# EAGLE board a2402-4069-distortion (EAGLE 7.5.0)

Size 100 x 80 mm. Coordinates in mm from the lower left corner, seen from the top.
Outline: 0,0 100,0 100,80 0,80 0,0
Copper layers (1*16): Top 0.035mm / dielectric 1.5mm / Bottom 0.035mm
Design rules "default": minimum track width 10mil, minimum drill 24mil, track to track 8mil, track to pad 8mil, pad to pad 8mil, via to via 8mil, smd to smd 8mil, copper to edge 40mil, drill to drill 8mil, minimum pad ring 10mil, minimum via ring 8mil, stop-mask expansion 4mil, vias tented up to drill 0mil, thermal gap 10mil

## Footprints (pad centres in the part's own frame; a part is rotated, then mirrored left to right if it is on the bottom)
E2-5 = drill 0.813 square: + -1.016,0 | drill 0.813: - 1.016,0
C-0805 = smd 1.3 x 1.5: 1 -0.95,0; 2 0.95,0
C050-035X075 = drill 0.7: 1 -2.54,0; 2 2.54,0
SO-8 = smd 0.66 x 2.032: 1 -1.905,-3.073; 2 -0.635,-3.073; 3 0.635,-3.073; 4 1.905,-3.073; 5 1.905,3.073; 6 0.635,3.073; 7 -0.635,3.073; 8 -1.905,3.073
DIP-14 = drill 0.813 square: 1 -7.62,-3.81 | drill 0.813: 2 -5.08,-3.81; 3 -2.54,-3.81; 4 0,-3.81; 5 2.54,-3.81; 6 5.08,-3.81; 7 7.62,-3.81; 8 7.62,3.81; 9 5.08,3.81; 10 2.54,3.81; 11 0,3.81; 12 -2.54,3.81; 13 -5.08,3.81; 14 -7.62,3.81
1206 = smd 1.35 x 1.2: 1 -1.7,0; 2 1.65,0
ST2-BOARD-50 = drill 0.8: A+15 44.285,7.31; A+15' 44.285,37.69; A-15 45.555,9.215; A-15' 45.555,35.785; ACV1 51.905,7.31; ACV1' 51.905,37.69; ACV2 53.175,9.215; ACV2' 53.175,35.785; ALFBK 49.365,7.31; ALFBK' 49.365,37.69; ALMIX 46.825,7.31; ALMIX' 46.825,37.69; ARFBK 50.635,9.215; ARFBK' 50.635,35.785; ARMIX 48.095,9.215; ARMIX' 48.095,35.785; ASMBCLK 55.715,9.215; ASMBCLK' 55.715,35.785; ASMBDAT 54.445,7.31; ASMBDAT' 54.445,37.69; B4 48.095,5.405; B4' 48.095,39.595; B5 49.365,3.5; B5' 49.365,41.5; B6 50.635,5.405; B6' 50.635,39.595; B7 51.905,3.5; B7' 51.905,41.5; B8 53.175,5.405; B8' 53.175,39.595; B+15 44.285,3.5; B+15' 44.285,41.5; B-15 45.555,5.405; B-15' 45.555,39.595; BINL 54.445,3.5; BINR 55.715,5.405; BOUTL' 54.445,41.5; BOUTR' 55.715,39.595; BSENSE 46.825,3.5; BSENSE' 46.825,41.5 | hole 2.2: 4,4; 4,46; 96,4; 96,46; 35,46; 65,46; 65,4; 35,4; 59.025,5.405; 40.975,5.405; 40.975,39.595; 59.025,39.595
RV11-DUAL = drill 1: 1 -1,-11; 1' -3,-11; 2 1,-11; 2' -5,-11; 3 3,-11; 3' 5,-11 | drill 2.2: S1 -6.5,0; S2 6.5,0
R-0805 = smd 1.3 x 1.5: 1 -0.95,0; 2 0.95,0
108-0052-EVX = drill 1.1 square: 1 -2.54,-2.54 | drill 1.1: 2 -2.54,0; 3 -2.54,2.54; 4 2.54,-2.54; 5 2.54,0; 6 2.54,2.54

## Placement (x,y rotation side)
C1  10U/35V  [E2-5]  83.82,-63.5 0 top  (outside the outline)
C2  10U/35V  [E2-5]  90.17,-63.5 0 top  (outside the outline)
C3  100N  [C-0805]  2.54,-109.22 0 top  (outside the outline)
C4  330N(FILM)  [C050-035X075]  3.81,-114.3 0 top  (outside the outline)
C5  330N(FILM)  [C050-035X075]  3.81,-120.65 0 top  (outside the outline)
C6  330N(FILM)  [C050-035X075]  -12.7,-179.07 0 top  (outside the outline)
C7  330N(FILM)  [C050-035X075]  -12.7,-185.42 0 top  (outside the outline)
C8  22P  [C-0805]  -38.1,-204.47 0 top  (outside the outline)
C9  100N  [C-0805]  54.61,-83.82 0 top  (outside the outline)
C10  22P  [C-0805]  -38.1,-208.28 0 top  (outside the outline)
C11  100N  [C-0805]  64.77,-83.82 0 top  (outside the outline)
DA1  NJM2068M  [SO-8]  -36.83,-189.23 0 top  (outside the outline)
DD1  CD4069UBE  [DIP-14]  11.43,-97.79 0 top  (outside the outline)
L1  BLM31AJ601SN1L  [1206]  2.54,-105.41 0 top  (outside the outline)
L2  BLM31AJ601SN1L  [1206]  34.29,-83.82 0 top  (outside the outline)
L3  BLM31AJ601SN1L  [1206]  39.37,-83.82 0 top  (outside the outline)
O1  [EMPTY]  36.83,-91.44 0 top  (outside the outline)
PCB1  rev.A  [ST2-BOARD-50]  8.89,-54.61 0 top  (outside the outline)
R1  2*A10K  [RV11-DUAL]  -49.53,-196.85 0 top  (outside the outline)
R3  10K  [R-0805]  2.54,-132.08 0 top  (outside the outline)
R4  10K  [R-0805]  2.54,-135.89 0 top  (outside the outline)
R5  100K  [R-0805]  2.54,-139.7 0 top  (outside the outline)
R6  100K  [R-0805]  2.54,-88.9 0 top  (outside the outline)
R7  100K  [R-0805]  7.62,-88.9 0 top  (outside the outline)
R8  100K  [R-0805]  2.54,-143.51 0 top  (outside the outline)
R9  10K  [R-0805]  2.54,-147.32 0 top  (outside the outline)
R10  10K  [R-0805]  2.54,-151.13 0 top  (outside the outline)
R11  100K  [R-0805]  2.54,-154.94 0 top  (outside the outline)
R12  100K  [R-0805]  2.54,-158.75 0 top  (outside the outline)
R13  10K  [R-0805]  2.54,-162.56 0 top  (outside the outline)
R14  10K  [R-0805]  2.54,-166.37 0 top  (outside the outline)
R15  10K  [R-0805]  2.54,-170.18 0 top  (outside the outline)
R16  10K  [R-0805]  2.54,-173.99 0 top  (outside the outline)
R17  2*A1M  [RV11-DUAL]  -8.89,-162.56 0 top  (outside the outline)
R18  2*A10K  [RV11-DUAL]  -25.4,-173.99 0 top  (outside the outline)
R19  10K  [R-0805]  -30.48,-189.23 0 top  (outside the outline)
R20  10K  [R-0805]  -30.48,-193.04 0 top  (outside the outline)
R21  10K  [R-0805]  -38.1,-196.85 0 top  (outside the outline)
R22  10K  [R-0805]  -38.1,-200.66 0 top  (outside the outline)
SA2  108-0052-EVX  [108-0052-EVX]  49.53,-67.31 0 top  (outside the outline)
U1  FX2-20P-1.27DS  [EMPTY]  39.37,-91.44 0 top  (outside the outline)
U2  FX2-20S-1.27DS  [EMPTY]  41.91,-91.44 0 top  (outside the outline)

## Library data of the parts
C1 C2 = capacitors-electrolytic; MOUSER: 647-USW1V100MDD
C3 C9 C11 = capacitors; MOUSER: 77-VJ0805V104MXBPBC
C4-C7 = capacitors; MOUSER: 505-MKS2.33/63/10
C8 C10 = capacitors; MOUSER: 77-VJ0805A220GXACBC
DA1 = ic-jrc; MOUSER: 513-NJM2068M
DD1 = ic-logic
L1-L3 = inductors; MOUSER: 81-BLM31AJ601SN1L
O1 = text
PCB1 = module-footprints
R1 R18 = potentiometers; MOUSER: 688-RK12L12C0A0E
R3 R4 R9 R10 R13-R16 R19-R22 = resistors; MOUSER: 660-RK73H2ATTD1002F
R5-R8 R11 R12 = resistors; MOUSER: 660-RK73H2ATTD1003F
R17 = potentiometers; MOUSER: 317-2102F-1M
SA2 = switches; MOUSER: 108-0052-EVX
U1 = hardware; MOUSER: 798-FX2-20P-1.27DS71
U2 = hardware; MOUSER: 798-FX2-20S-1.27DS71

## Nets
+15V [power]: C1.+ C9.2 DA1.8 L2.2
-15V [power]: C2.- C11.1 DA1.4 L3.2
FBK_LEFT: PCB1.ALFBK PCB1.ALFBK'
FBK_RIGHT: PCB1.ARFBK PCB1.ARFBK'
GND: C1.- C2.+ C3.1 C9.1 C11.2 DA1.3 DA1.5 DD1.7 PCB1.B4 PCB1.B4' PCB1.B5 PCB1.B5' PCB1.B6 PCB1.B6' PCB1.B7 PCB1.B7' PCB1.B8 PCB1.B8' R1.1 R1.1' R6.2 R7.2 R18.1 R18.1'
LMIX: PCB1.ALMIX PCB1.ALMIX'
N$1: C3.2 DD1.14 L1.2
N$2: R15.2 R17.1
N$3: R16.2 R17.1'
N$4: C4.2 PCB1.BINL SA2.1
N$5: C4.1 R1.3
N$6: DD1.1 R3.1 R5.1
N$7: DD1.2 R5.2 R9.1
N$8: DD1.3 R9.2 R11.1
N$9: DD1.4 R11.2 R13.1
N$10: DD1.5 R13.2 R15.1
N$11: C6.1 DD1.6 R17.2 R17.3
N$12: C6.2 R18.3
N$13: R18.2 R19.1
N$14: C8.1 DA1.2 R19.2 R21.1
N$15: R1.2 R3.2
N$16: PCB1.BSENSE PCB1.BSENSE'
N$17: C8.2 DA1.1 R21.2 SA2.3
N$18: C5.1 R1.3'
N$19: C5.2 PCB1.BINR SA2.4
N$20: R1.2' R4.2
N$21: DD1.9 R4.1 R8.1
N$22: DD1.8 R8.2 R10.1
N$23: DD1.11 R10.2 R12.1
N$24: DD1.10 R12.2 R14.1
N$25: PCB1.BOUTR' R7.1 SA2.5
N$26: DD1.13 R14.2 R16.1
N$27: C7.1 DD1.12 R17.2' R17.3'
N$28: PCB1.BOUTL' R6.1 SA2.2
N$29: C7.2 R18.3'
N$30: R18.2' R20.1
N$31: C10.1 DA1.6 R20.2 R22.1
N$32: C10.2 DA1.7 R22.2 SA2.6
N$36: L3.1 PCB1.A-15 PCB1.A-15' PCB1.B-15 PCB1.B-15'
N$38: PCB1.ASMBDAT PCB1.ASMBDAT'
N$41: PCB1.ACV1 PCB1.ACV1'
N$42: PCB1.ACV2 PCB1.ACV2'
N$43: PCB1.ASMBCLK PCB1.ASMBCLK'
P+15V: L1.1 L2.1 PCB1.A+15 PCB1.A+15' PCB1.B+15 PCB1.B+15'
RMIX: PCB1.ARMIX PCB1.ARMIX'

## Tracks (layer width: path | path; a pad name or v marks a point on that pad's centre or on a via)
+15V  (3 unrouted)
-15V  (3 unrouted)
FBK_LEFT  (1 unrouted)
FBK_RIGHT  (1 unrouted)
GND  (23 unrouted)
LMIX  (1 unrouted)
N$1  (2 unrouted)
N$2  (1 unrouted)
N$3  (1 unrouted)
N$4  (2 unrouted)
N$5  (1 unrouted)
N$6  (2 unrouted)
N$7  (2 unrouted)
N$8  (2 unrouted)
N$9  (2 unrouted)
N$10  (2 unrouted)
N$11  (3 unrouted)
N$12  (1 unrouted)
N$13  (1 unrouted)
N$14  (3 unrouted)
N$15  (1 unrouted)
N$16  (1 unrouted)
N$17  (3 unrouted)
N$18  (1 unrouted)
N$19  (2 unrouted)
N$20  (1 unrouted)
N$21  (2 unrouted)
N$22  (2 unrouted)
N$23  (2 unrouted)
N$24  (2 unrouted)
N$25  (2 unrouted)
N$26  (2 unrouted)
N$27  (3 unrouted)
N$28  (2 unrouted)
N$29  (1 unrouted)
N$30  (1 unrouted)
N$31  (3 unrouted)
N$32  (3 unrouted)
N$36  (4 unrouted)
N$38  (1 unrouted)
N$41  (1 unrouted)
N$42  (1 unrouted)
N$43  (1 unrouted)
P+15V  (5 unrouted)
RMIX  (1 unrouted)